# EAGLE board MRCS-Integrated-Turnout-Controller (EAGLE 7.7.0)
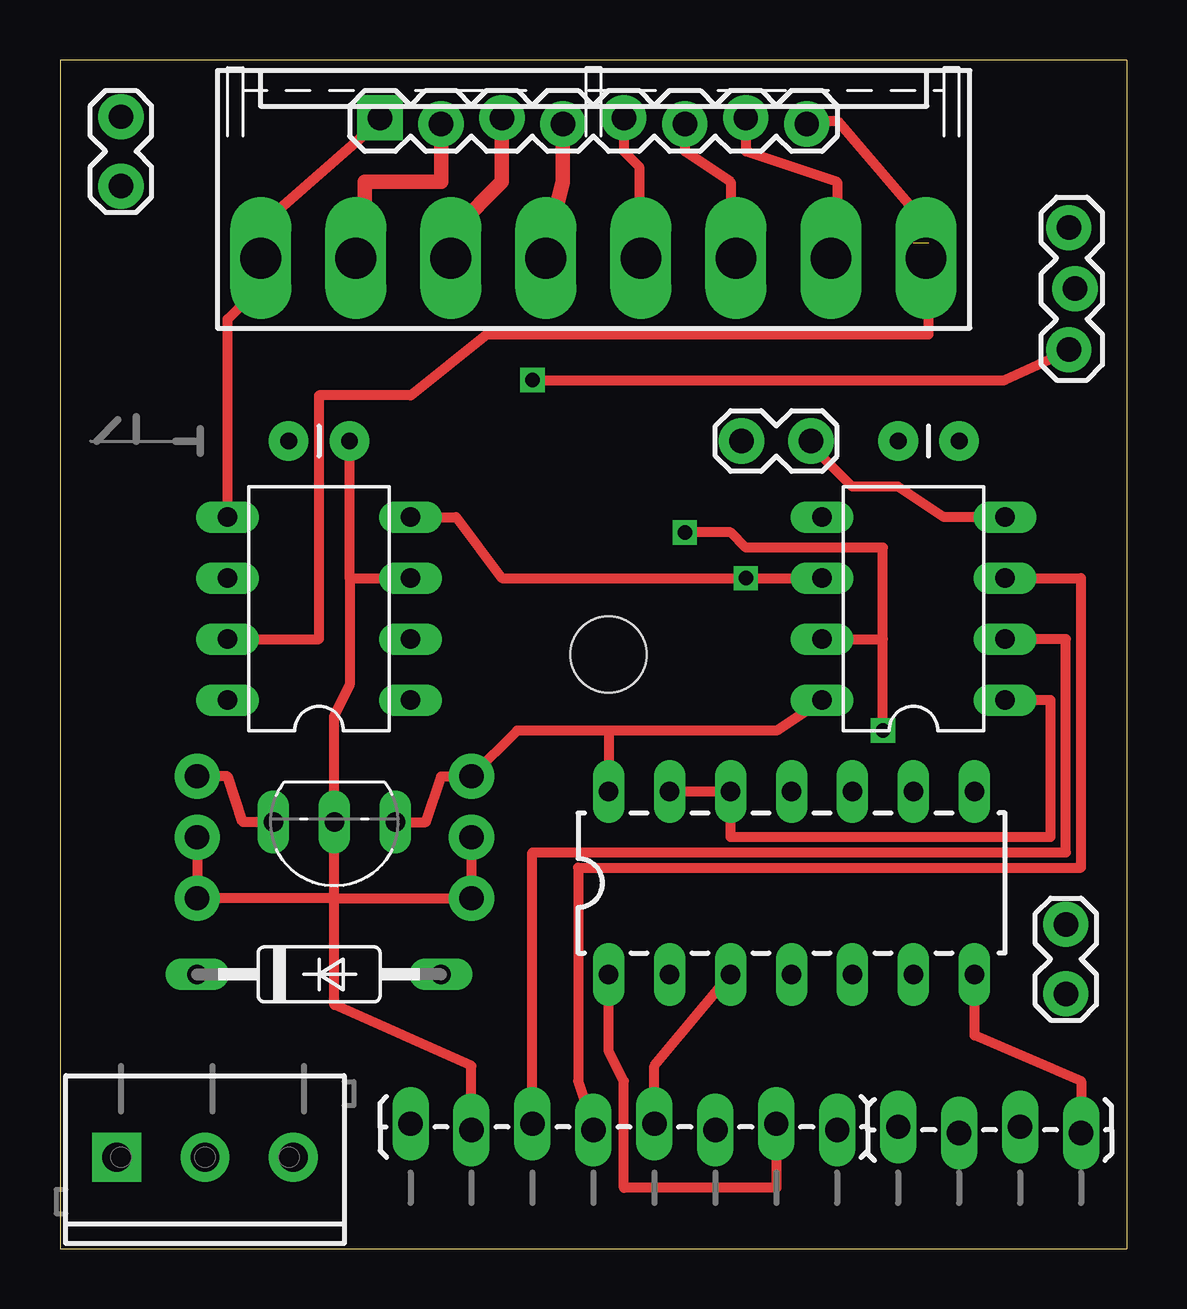
[diagram p0: board, top side]
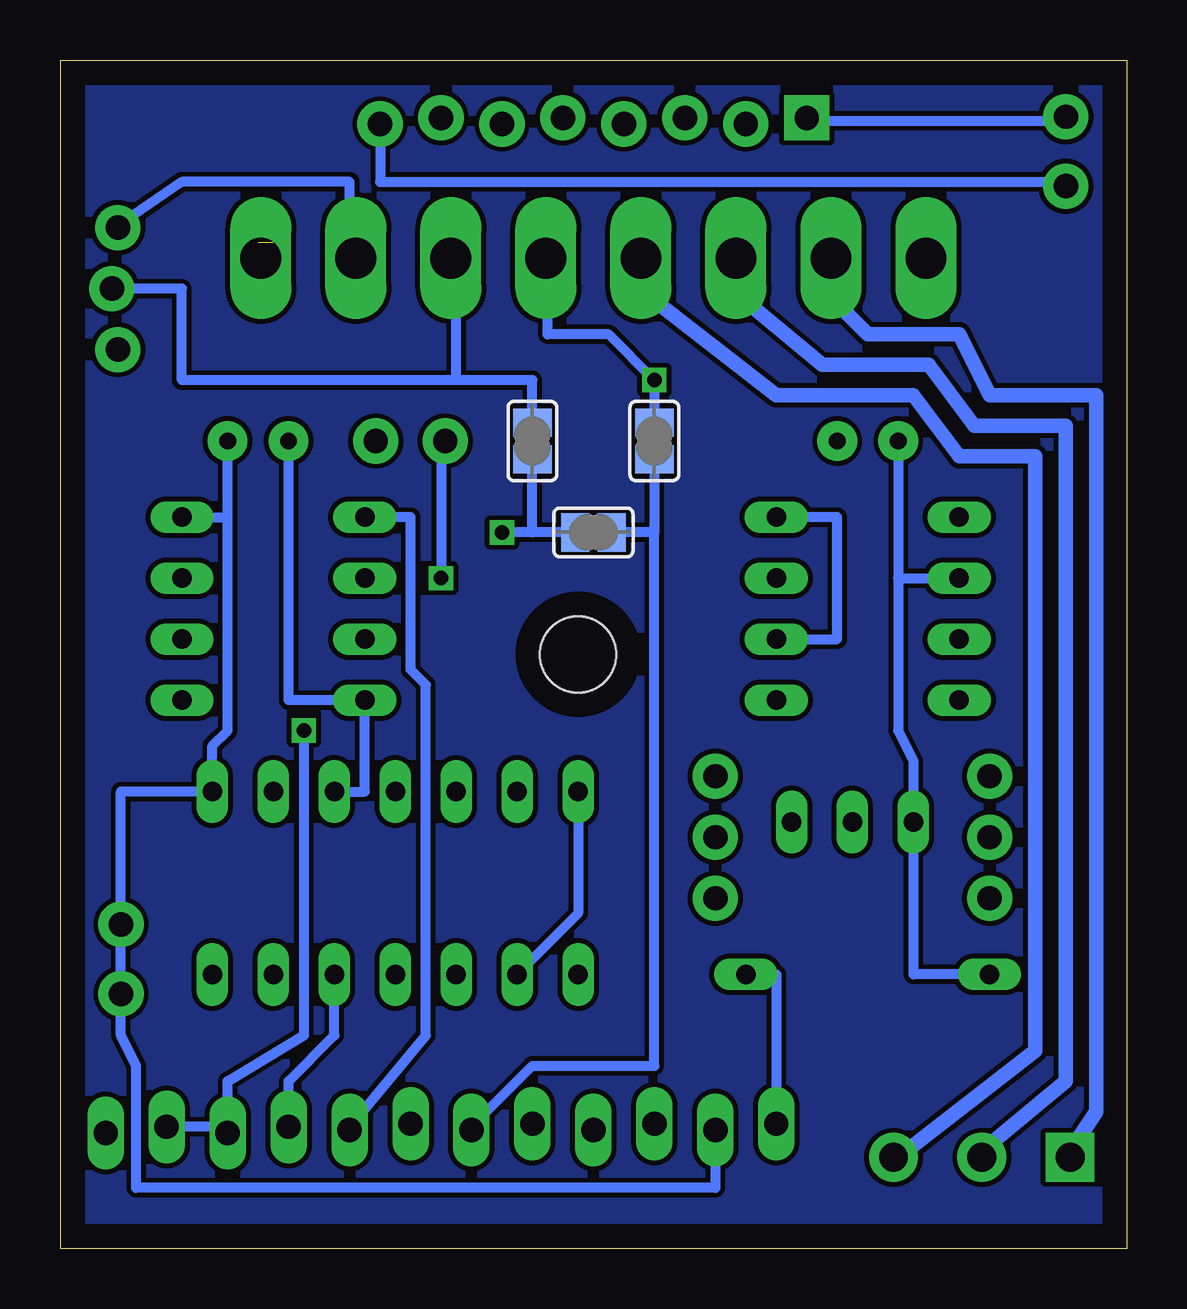
[diagram p1: board, bottom side, seen from below]

Size 44.45 x 49.53 mm. Coordinates in mm from the lower left corner, seen from the top.
Outline: 0,0 44.45,0 44.45,49.53 0,49.53 0,0
Copper layers (1*16): Top 0.035mm / dielectric 1.5mm / Bottom 0.035mm
Design rules "default": minimum track width 10mil, minimum drill 24mil, track to track 8mil, track to pad 8mil, pad to pad 8mil, via to via 8mil, smd to smd 8mil, copper to edge 40mil, drill to drill 8mil, minimum pad ring 10mil, minimum via ring 8mil, stop-mask expansion 4mil, vias tented up to drill 0mil, thermal gap 10mil

## Footprints (pad centres in the part's own frame; a part is rotated, then mirrored left to right if it is on the bottom)
SJ = smd 1.168 x 1.6: 1 -0.762,0; 2 0.762,0
CAP-PTH-SMALL = drill 0.7 pad 1.651: 1 0,0; 2 2.54,0
1X08_LOCK = drill 1.016 pad 1.88 square: 1 0,0.127 | drill 1.016 pad 1.88: 2 2.54,-0.127; 3 5.08,0.127; 4 7.62,-0.127; 5 10.16,0.127; 6 12.7,-0.127; 7 15.24,0.127; 8 17.78,-0.127
DRILL_0.1250 = hole 3.175: 0,0
C2992 = drill 0.813 long: A 5.08,0; C -5.08,0
1X03_NO_SILK = drill 1.016 pad 1.88: 1 0,0; 2 2.54,0; 3 5.08,0
1X02_LOCK = drill 1.016 pad 1.88: 1 -0.178,0; 2 2.718,0
1X08_LOCK_LONGPADS = drill 1.016 long: 1 0,0.127; 2 2.54,-0.127; 3 5.08,0.127; 4 7.62,-0.127; 5 10.16,0.127; 6 12.7,-0.127; 7 15.24,0.127; 8 17.78,-0.127
1X04_LOCK_LONGPADS = drill 1.016 long: 1 0,0; 2 2.54,-0.254; 3 5.08,0; 4 7.62,-0.254
1X03_LOCK = drill 1.016 pad 1.88: 1 0,0.127; 2 2.54,-0.127; 3 5.08,0.127
SCREWTERMINAL-3.5MM-3_LOCK.007S = drill 1.2 pad 2.032 square: 1 -0.178,0 | drill 1.2 pad 2.032: 2 3.5,0; 3 7.178,0
KK-156-8-F = drill 1.7 pad 2.184 long: 1 -13.86,0; 2 -9.9,0; 3 -5.94,0; 4 -1.98,0; 5 1.98,0; 6 5.94,0; 7 9.9,0; 8 13.86,0
DIL14 = drill 0.813 long: 1 -8.89,-3.81; 2 -6.35,-3.81; 3 -3.81,-3.81; 4 -1.27,-3.81; 5 1.27,-3.81; 6 3.81,-3.81; 7 6.35,-3.81; 8 6.35,3.81; 9 3.81,3.81; 10 1.27,3.81; 11 -1.27,3.81; 12 -3.81,3.81; 13 -6.35,3.81; 14 -8.89,3.81
DIL08 = drill 0.813 long: 1 -3.81,-3.81; 2 -1.27,-3.81; 3 1.27,-3.81; 4 3.81,-3.81; 5 3.81,3.81; 6 1.27,3.81; 7 -1.27,3.81; 8 -3.81,3.81
TO92-BCE = drill 0.813 long: B -2.54,0; C 0,0; E 2.54,0

## Placement (x,y rotation side)
ACTPOS  [SJ]  22.23,29.84 0 bottom
C4  .01uf  [CAP-PTH-SMALL]  37.47,33.66 180 top
E$1  [1X08_LOCK]  13.34,46.99 0 top
E$2  [DRILL_0.1250]  22.86,24.77 0 top
E$3  [CAP-PTH-SMALL]  9.53,33.66 0 top
E$4  [C2992]  10.79,11.43 0 top
E$5  [CA-PROP65WARNING]  3.17,24.13 270 top
E$6  [1X03_NO_SILK]  5.71,14.61 90 top
E$7  [MRCSLOGOTOP]  6.35,32.38 90 top
E$8  [1X02_LOCK]  31.11,33.66 180 top
E$9  [1X08_LOCK_LONGPADS]  14.61,5.08 0 top
E$10  [1X04_LOCK_LONGPADS]  34.92,5.08 0 top
E$11  [1X02_LOCK]  41.91,10.79 90 top
E$12  [1X03_LOCK]  42.16,37.47 90 top
E$13  [1X02_LOCK]  2.54,44.45 90 top
E$18  [1X03_NO_SILK]  17.14,14.61 90 top
FROG  [SCREWTERMINAL-3.5MM-3_LOCK.007S]  2.54,3.81 0 top
J1  [KK-156-8-F]  22.23,41.27 0 top
RN1  1K  [DIL14]  31.75,15.24 0 top
T5  [SJ]  19.68,33.66 90 bottom
T6  [SJ]  24.77,33.66 90 bottom
U1  TC4428A  [DIL08]  10.79,26.67 90 top
U2  Tiny85  [DIL08]  35.56,26.67 90 top
U3  U3  [TO92-BCE]  11.43,17.78 180 top

## Library data of the parts
ACTPOS T5 T6 = jumper
C4 E$3 = SparkFun-Passives
E$1 E$6 E$8-E$13 E$18 FROG = SparkFun-Connectors
E$2 = special-drill
E$4 = diode
E$5 = MRCS-prop65warningBtm
E$7 = MRCSLogoTop
J1 = SPCoast
RN1 = SparkFun-DigitalIC
U1 U2 = ic-package
U3 = transistor

## Nets
S$1: C4.1
S$2: E$10.1
S$3: U1.4 U2.6
S$6: U2.7
S$7: E$3.2 U1.3
S$9: U2.5
S$10: U3.E
S$13: U2.4
S$14: U1.2
S$19: U2.2
S$29: C4.2 RN1.10 U2.8 U3.B
S$30: U2.3
S$31: U2.1
S$33: U1.7
S$39: U1.6

## Tracks (layer width: path | path; a pad name or v marks a point on that pad's centre or on a via)
GND
  pour Bottom: 0,0 44.45,0 44.45,49.53 0,49.53
S$1
  Bottom 0.406: 41.91,19.05 38.1,19.05 38.1,20.95 37.47,21.59 C4.1
S$2
  Bottom 0.406: E$10.1 34.92,6.99 33.02,8.89 33.02,11.43
S$3  (via drill 0.6)
  Top 0.406: U1.4 16.51,30.48 18.41,27.94 v28.57,27.94 U2.6
  Bottom 0.406: 28.57,33.66 v28.57,27.94
S$4
  Top 0.406: 6.99,38.73 8.26,40.01
S$5
  Bottom 0.406: 13.34,46.99 2.54,46.99
S$6  (via drill 0.6)
  Top 0.406: v34.29,21.59 34.29,25.4 | U2.7 34.29,25.4 | 34.29,25.4 34.29,29.21 28.57,29.21 27.94,29.84 v26.04,29.84
  Bottom 0.406: 40.01,5.08 37.47,5.08 37.47,6.99 34.29,8.89 v34.29,21.59 | 19.68,29.84 v26.04,29.84
S$7
  Top 0.406: 12.06,27.94 U1.3 | 12.06,27.94 E$3.2 | 11.43,14.61 17.14,14.61 17.14,17.14 | 12.06,27.94 12.06,23.5 11.43,22.23 11.43,14.61 | 11.43,14.61 5.71,14.61 5.71,17.14 | 17.14,5.08 17.14,7.62 11.43,10.16 11.43,14.61
S$8
  Top 0.406: 29.84,5.08 29.84,2.54 23.5,2.54 23.5,6.99 22.86,8.26 22.86,11.43
S$9
  Bottom 0.406: U2.5 29.84,30.48 29.84,24.13 29.21,23.5 29.21,8.89 32.38,5.08
S$10
  Top 0.406: U3.E 7.62,17.78 6.99,19.68 5.71,19.68
S$11
  Top 0.406: 24.77,5.08 24.77,7.62 27.94,11.43
S$12
  Top 0.406: 6.99,30.48 6.99,38.73
S$13
  Top 0.406: U2.4 36.83,30.48 34.92,31.75 33.02,31.75 31.11,33.66
  Bottom 0.406: U2.4 37.47,30.48
S$14
  Bottom 0.406: 14.61,30.48 12.06,30.48 12.06,25.4 U1.2
S$15
  Top 0.61: 12.7,41.91 12.7,44.45 15.88,44.45 15.88,46.99
S$16
  Bottom 0.406: 24.77,29.84 24.77,36.2 27.94,36.2 | 27.94,36.2 27.94,39.37 | 27.94,36.2 39.37,36.2 39.37,40.01 42.16,40.01
S$17
  Bottom 0.406: 32.38,42.55 32.38,44.45 39.37,44.45 42.16,42.55
S$18
  Top 0.406: 23.5,46.99 23.5,45.72 24.13,45.09 24.13,42.55
S$19
  Top 0.406: 19.68,5.08 19.68,16.51 41.91,16.51 41.91,25.4 U2.2
S$20  (1 unrouted)
  Top 0.406: 31.11,46.99 32.38,46.99 36.2,42.55 35.56,41.91
S$21
  Bottom 0.406: 22.86,19.05 22.86,13.97 25.4,11.43
S$22
  Bottom 0.406: 31.11,46.99 31.11,44.45
S$23
  Top 0.406: 26.04,46.99 26.04,45.72 27.94,44.45 27.94,41.91
S$24
  Top 0.61: 20.95,46.99 20.95,44.45 20.32,41.91
S$25
  Top 0.406: 13.34,46.99 8.26,42.55
S$26
  Top 0.61: 16.51,42.55 18.41,44.45 18.41,46.99
S$27
  Bottom 0.406: 27.3,5.08 24.77,7.62 19.68,7.62 19.68,29.84
S$28
  Bottom 0.406: 31.11,44.45 2.54,44.45
S$29
  Top 0.406: U3.B 15.24,17.78 15.88,19.68 17.14,19.68 19.05,21.59 22.86,21.59 | U2.8 29.84,21.59 22.86,21.59 | 22.86,21.59 22.86,19.68
  Bottom 0.406: C4.2 34.92,22.86 U2.8 31.75,19.05 RN1.10
S$30
  Top 0.406: U2.3 42.55,27.94 42.55,15.88 21.59,15.88 21.59,6.99 22.23,5.08
S$31
  Top 0.406: 25.4,19.05 27.94,19.05 27.94,17.14 41.27,17.14 41.27,22.86 U2.1
S$32
  Bottom 0.61: 20.32,40.01 14.61,35.56 8.89,35.56 6.99,33.02 3.81,33.02 3.81,8.26 9.53,3.81
S$33
  Top 0.406: U1.7 10.79,25.4 10.79,35.56 14.61,35.56 17.78,38.1 36.2,38.1 36.2,40.01
S$34
  Bottom 0.406: 17.14,5.08 17.14,2.54 41.27,2.54 41.27,7.62 41.91,8.89 41.91,19.05
S$35
  Top 0.406: 38.1,11.43 38.1,8.89 42.55,6.99 42.55,5.08
S$36  (via drill 0.6)
  Top 0.406: v19.68,36.2 39.37,36.2 42.16,37.47
  Bottom 0.406: 19.68,29.84 v19.68,36.2 21.59,38.1 24.13,38.1 24.13,40.01
S$37
  Top 0.406: 28.57,46.99 28.57,45.72 32.38,44.45 32.38,42.55
S$38
  Bottom 0.406: 15.88,11.43 14.61,11.43 14.61,5.08
S$39
  Bottom 0.406: 9.53,27.94 U1.6 | 9.53,33.66 9.53,27.94 | 9.53,27.94 9.53,21.59 8.89,20.32 8.89,11.43 5.71,11.43
S$40
  Bottom 0.61: 16.51,40.01 12.7,36.83 8.26,36.83 6.35,34.29 2.54,34.29 2.54,6.99 6.35,3.81
S$43
  Bottom 0.61: 12.7,40.01 10.79,38.1 6.99,38.1 5.71,35.56 1.27,35.56 1.27,5.71 2.54,3.81

## Text on the board
tDocu: J2 | 1 | 1 | 8 | J1 | 8 | 7 | X-Over | 6 | 5 | 1 | 2 | 3 | 4 | 5 | 6 | 7 | 8 | C4 | C1 | J4 | J6 | Gnd | 4 | THRW | 8 | 1 | 1 | MRCS Designs | 00119-2021 v1.3a | ITC | 8 | U1 | U2 | + | 5v | + | .1uf | .33uf | C2 | D1 | C3 | - | Gnd | J3 | R | N | FROG | J5 | ST1 | 1 | 2 | 3 | 4 | 5 | 6 | 7 | 8 | 9 | 10 | 11 | 12 | +V | -V | Rem | Lcl | ULk | FB | U+ | U- | N+ | N- | R+ | R-
bDocu: Integrated Turnout Controller
_tValues: U3
_tDocu: RN1
_bDocu: T5 | T6 | ACTPOS